# Altium PCB adapter.PcbDoc
Units mm, origin at the board's own origin, x right, y up, seen from the top; angles counter-clockwise.
Board outline 76.2 x 50.04 mm, 2 copper layers (Top Layer, Bottom Layer); 161 components, 104 nets, 335 pads, 14 vias.
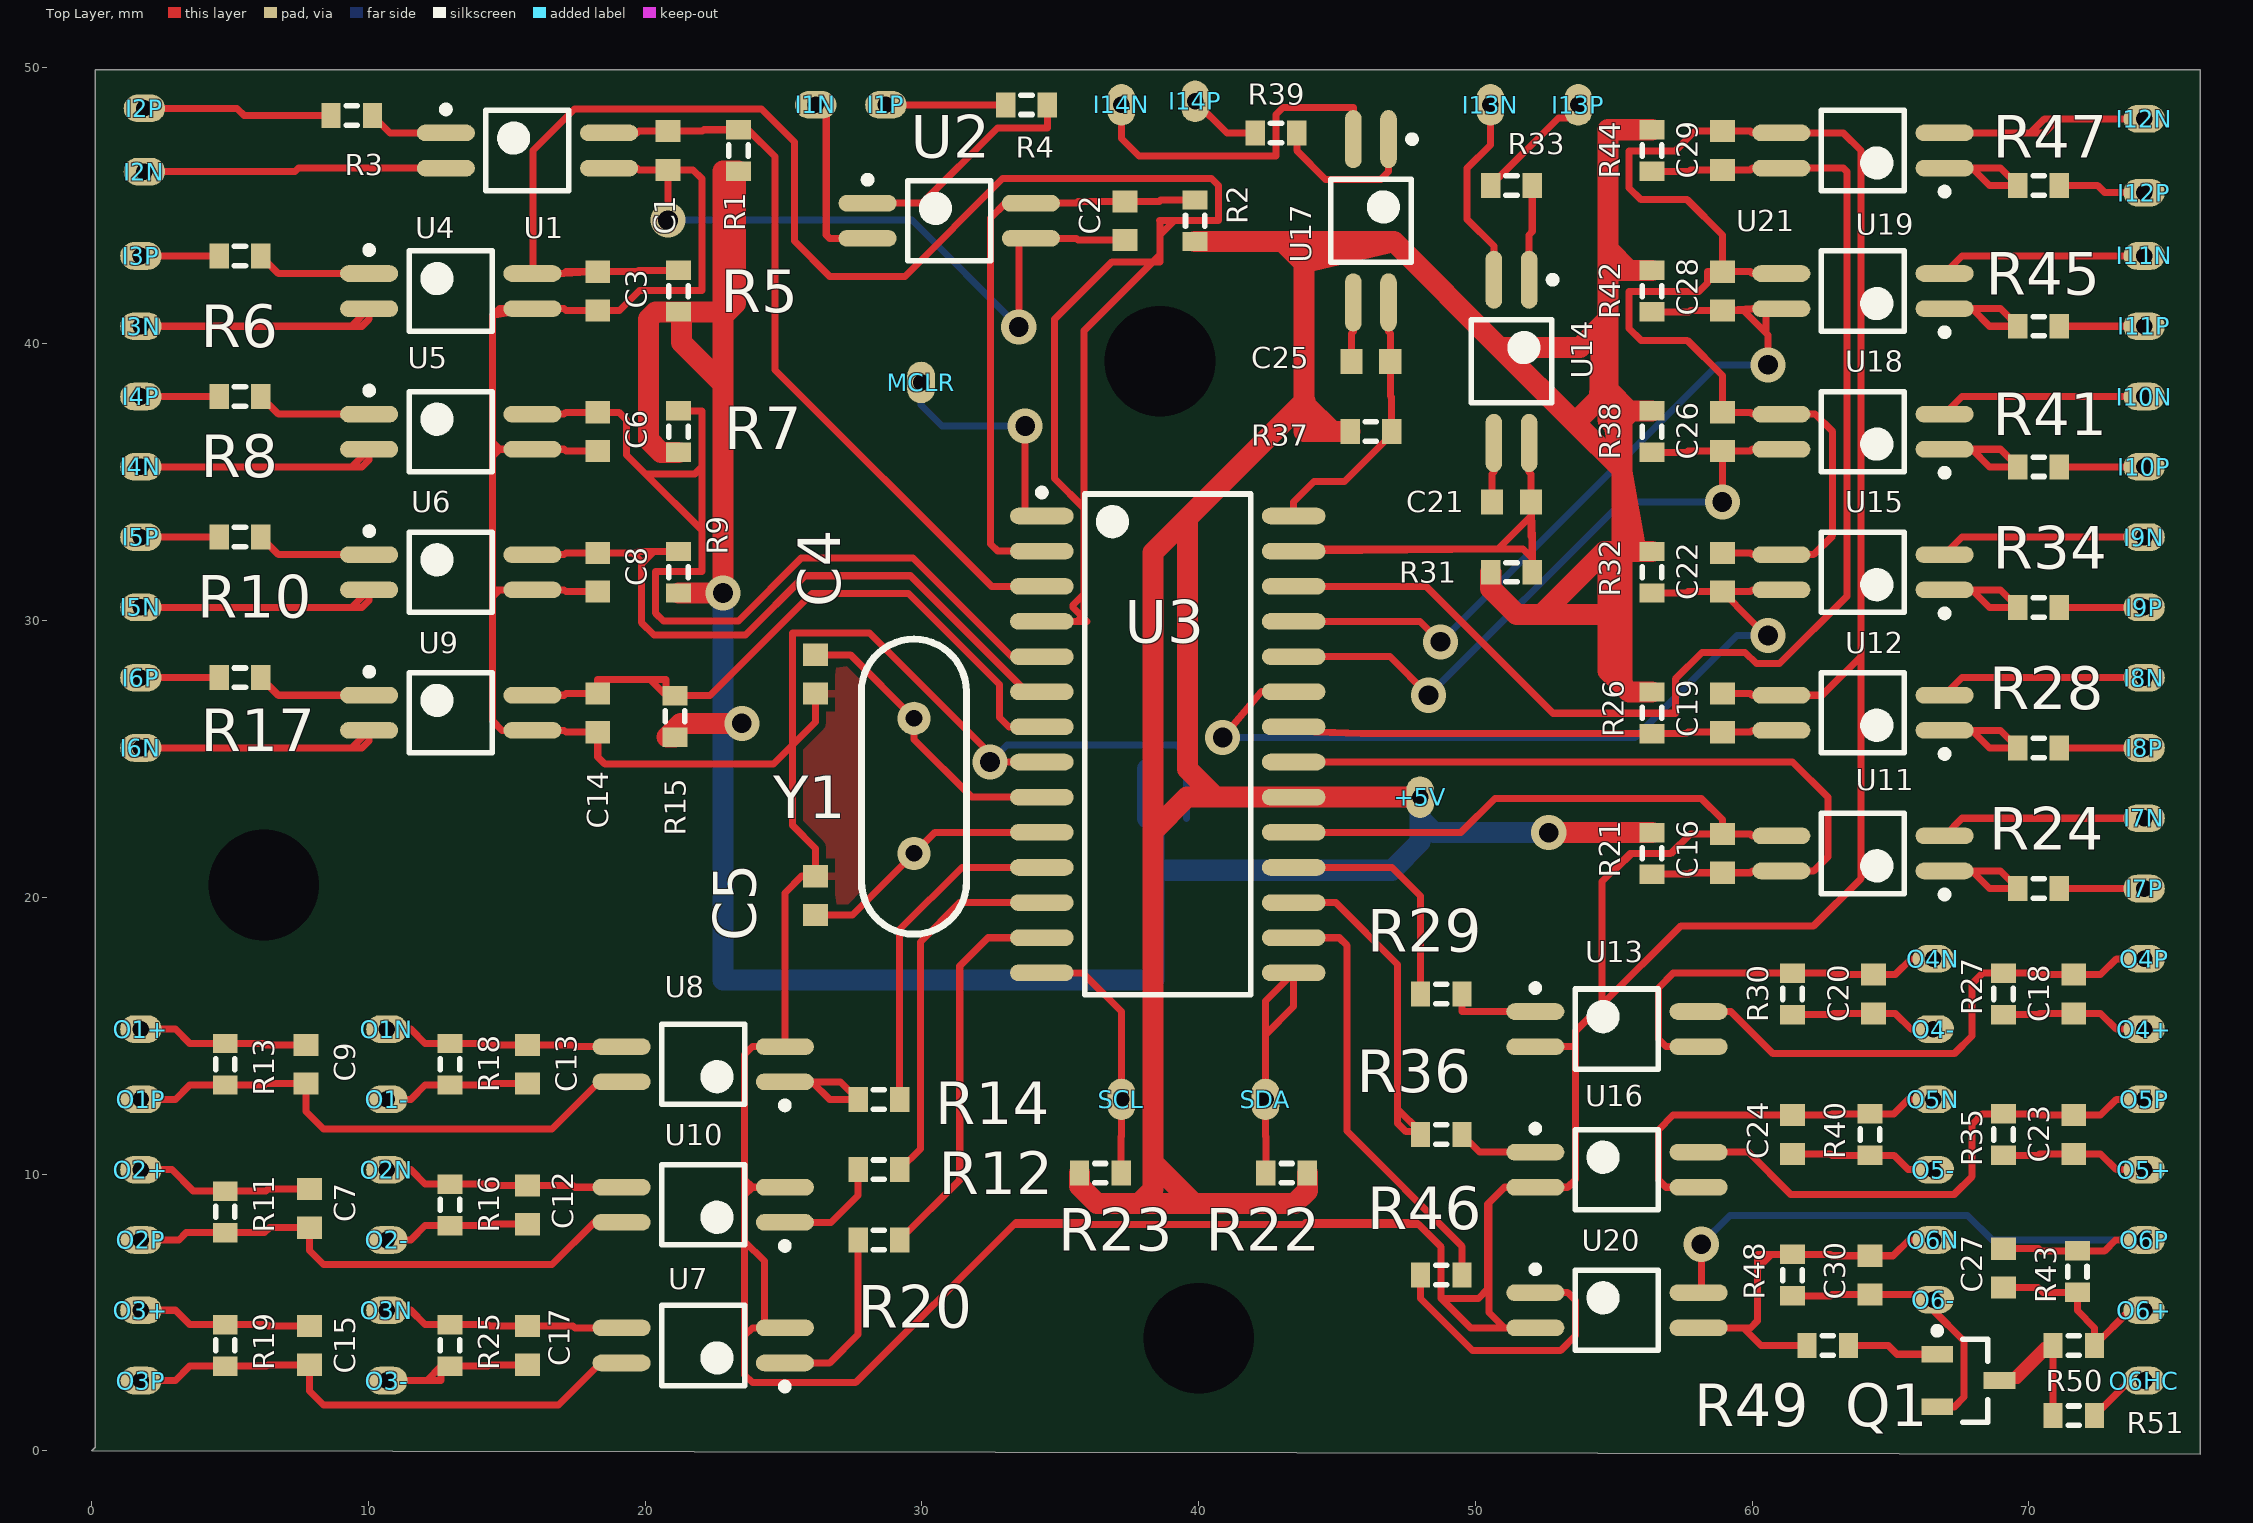
[diagram p0: Top Layer view]
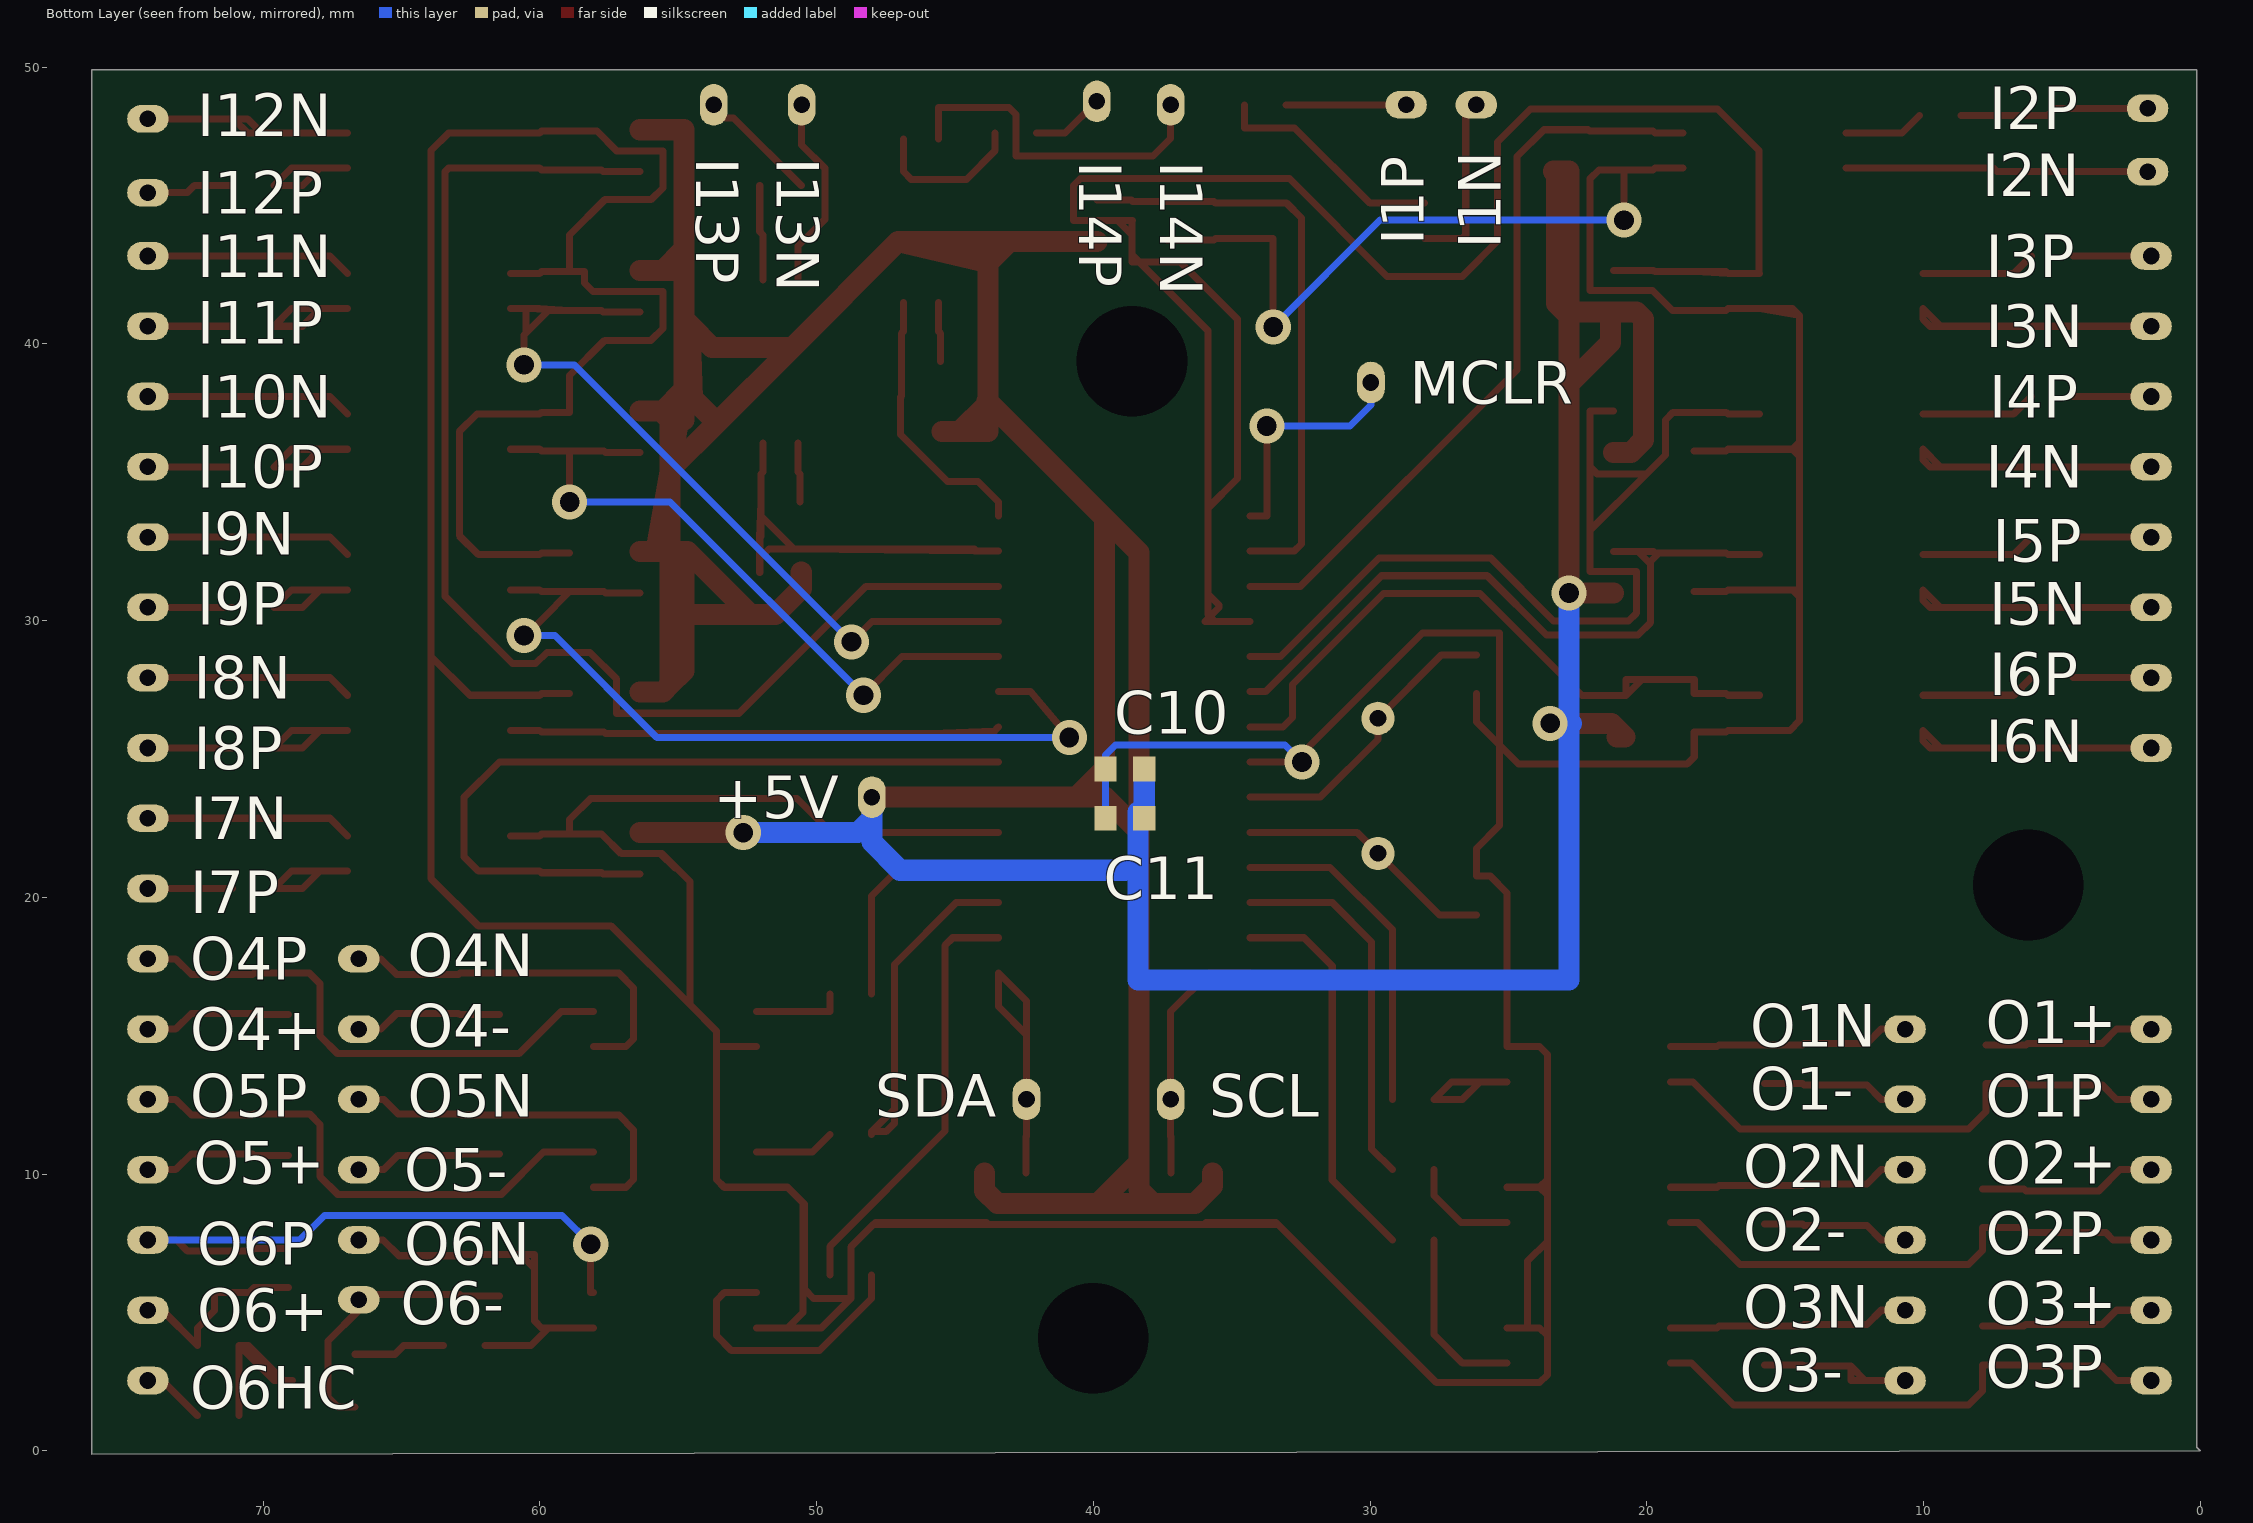
[diagram p1: Bottom Layer view, seen from below]

## Layer stack, top to bottom
Top Solder: solder mask 0.0102, Solder Resist, Dk 3.5
Top Layer: signal copper 0.0356
Dielectric 1: dielectric 0.32, FR-4, Dk 4.8
Bottom Layer: signal copper 0.0356
Bottom Solder: solder mask 0.0102, Solder Resist, Dk 3.5

## Board outline
0,0 0.127,0.127 0.127,49.911 76.2,49.911 76.2,-0.127

## Design rules (kind name [scope] priority, off if disabled: settings)
Clearance [All] p1: gap=0.254
HoleSize [All] p1: absolutevalues=TRUE maxlimit=5.08 minlimit=0.025 maxpercent=80.000 minpercent=20.000
PolygonConnect [All] p1: connectstyle=Relief reliefconductorwidth=0.254 reliefentries=4 polygonreliefangle="90 Angle" airgapwidth=0.254
RoutingVias [All] p1: holewidth=0.711 width=1.27 viastyle="Through Hole" minholewidth=0.711 minwidth=1.27 maxholewidth=0.711 maxwidth=1.27
SilkToSilkClearance [All] p1: silktosilkclearance=0.1
SilkToSolderMaskClearance [IsPad] p1: minsilkscreentomaskgap=0.1 clearancetoexposedcopper=TRUE
SolderMaskExpansion [All] p1: expansion=0.102
Width VCC_Width [InNet('VCC')] p1: maxlimit=1.016 minlimit=0.508 preferedwidth=0.762 minimp=50.000000 maximp=50.000000 favimp=50.000000
Width [All] p2: maxlimit=0.254 minlimit=0.254 preferedwidth=0.254
27 further rules are at their usual default settings.

## Components (designator, comment, footprint, x,y, rotation, side; value= is the part's Value field where it differs from the comment)
+5V "IN" PIN1L 48.006,23.622 r180 top
C1 "10nF" 1608[0603] 20.828,46.99 r90 top
C2 "10nF" 1608[0603] 37.338,44.45 r90 top
C3 "10nF" 1608[0603] 18.288,41.91 r90 top
C4 "32pF" 1608[0603] 26.162,28.067 r90 top
C5 "32pF" 1608[0603] 26.162,20.066 r90 top
C6 "10nF" 1608[0603] 18.288,36.83 r90 top
C7 "10nF" 1608[0603] 7.874,8.763 r90 top
C8 "10nF" 1608[0603] 18.288,31.75 r90 top
C9 "10nF" 1608[0603] 7.747,13.97 r90 top
C10 "10uF" 1608[0603] 38.862,24.638 r180 bottom
C11 "100nF" 1608[0603] 38.862,22.86 r180 bottom
C12 "10nF" 1608[0603] 15.748,8.89 r90 top
C13 "10nF" 1608[0603] 15.748,13.97 r90 top
C14 "10nF" 1608[0603] 18.288,26.67 r90 top
C15 "10nF" 1608[0603] 7.874,3.81 r90 top
C16 "10nF" 1608[0603] 58.928,21.59 r270 top
C17 "10nF" 1608[0603] 15.748,3.81 r90 top
C18 "10nF" 1608[0603] 71.628,16.51 r270 top
C19 "10nF" 1608[0603] 58.928,26.67 r270 top
C20 "10nF" 1608[0603] 64.389,16.51 r90 top
C21 "10nF" 1608[0603] 51.308,34.29 r0 top
C22 "10nF" 1608[0603] 58.928,31.75 r270 top
C23 "10nF" 1608[0603] 71.628,11.43 r270 top
C24 "10nF" 1608[0603] 61.468,11.43 r90 top
C25 "10nF" 1608[0603] 46.228,39.37 r0 top
C26 "10nF" 1608[0603] 58.928,36.83 r270 top
C27 "10nF" 1608[0603] 69.088,6.604 r270 top
C28 "10nF" 1608[0603] 58.928,41.91 r270 top
C29 "10nF" 1608[0603] 58.928,46.99 r270 top
C30 "10nF" 1608[0603] 64.262,6.35 r90 top
I1N "IN" PIN1L 26.162,48.641 r90 top
I1P "IN" PIN1L 28.702,48.641 r270 top
I2N "IN" PIN1L 1.905,46.228 r270 top
I2P "IN" PIN1L 1.905,48.514 r270 top
I3N "IN" PIN1L 1.778,40.64 r270 top
I3P "IN" PIN1L 1.778,43.18 r90 top
I4N "IN" PIN1L 1.778,35.56 r270 top
I4P "IN" PIN1L 1.778,38.1 r270 top
I5N "IN" PIN1L 1.778,30.48 r270 top
I5P "IN" PIN1L 1.778,33.02 r270 top
I6N "IN" PIN1L 1.778,25.4 r270 top
I6P "IN" PIN1L 1.778,27.94 r270 top
I7N "IN" PIN1L 74.168,22.86 r270 top
I7P "IN" PIN1L 74.168,20.32 r270 top
I8N "IN" PIN1L 74.168,27.94 r90 top
I8P "IN" PIN1L 74.168,25.4 r90 top
I9N "IN" PIN1L 74.168,33.02 r270 top
I9P "IN" PIN1L 74.168,30.48 r270 top
I10N "IN" PIN1L 74.168,38.1 r270 top
I10P "IN" PIN1L 74.168,35.56 r270 top
I11N "IN" PIN1L 74.168,43.18 r270 top
I11P "IN" PIN1L 74.168,40.64 r270 top
I12N "IN" PIN1L 74.168,48.133 r270 top
I12P "IN" PIN1L 74.168,45.466 r270 top
I13N "IN" PIN1L 50.546,48.641 r180 top
I13P "IN" PIN1L 53.721,48.641 r180 top
I14N "IN" PIN1L 37.211,48.641 r180 top
I14P "IN" PIN1L 39.878,48.768 r180 top
MCLR "IN" PIN1L 29.972,38.608 r180 top
O1+ "SDA" PIN1L 1.778,15.24 r270 top
O1- "SDA" PIN1L 10.668,12.7 r90 top
O1N "SDA" PIN1L 10.668,15.24 r270 top
O1P "SDA" PIN1L 1.778,12.7 r270 top
O2+ "SDA" PIN1L 1.778,10.16 r270 top
O2- "SDA" PIN1L 10.668,7.62 r90 top
O2N "SDA" PIN1L 10.668,10.16 r270 top
O2P "SDA" PIN1L 1.778,7.62 r270 top
O3+ "SDA" PIN1L 1.778,5.08 r270 top
O3- "SDA" PIN1L 10.668,2.54 r90 top
O3N "SDA" PIN1L 10.668,5.08 r90 top
O3P "SDA" PIN1L 1.778,2.54 r270 top
O4+ "SDA" PIN1L 74.168,15.24 r270 top
O4- "SDA" PIN1L 66.548,15.24 r270 top
O4N "SDA" PIN1L 66.548,17.78 r270 top
O4P "SDA" PIN1L 74.168,17.78 r270 top
O5+ "SDA" PIN1L 74.168,10.16 r90 top
O5- "SDA" PIN1L 66.548,10.16 r270 top
O5N "SDA" PIN1L 66.548,12.7 r270 top
O5P "SDA" PIN1L 74.168,12.7 r270 top
O6+ "SDA" PIN1L 74.168,5.08 r270 top
O6- "SDA" PIN1L 66.548,5.461 r270 top
O6HC "SDA" PIN1L 74.168,2.54 r90 top
O6N "SDA" PIN1L 66.548,7.62 r270 top
O6P "SDA" PIN1L 74.168,7.62 r270 top
Q1 "BC847" SOT-23_N 67.818,2.54 r0 top
R1 "4.7k" J1-0603 23.368,46.99 r90 top
R2 "4.7k" J1-0603 39.878,44.45 r90 top
R3 "3.3k" J1-0603 9.398,48.26 r180 top
R4 "3.3k" J1-0603 33.782,48.641 r180 top
R5 "4.7k" J1-0603 21.209,41.91 r90 top
R6 "3.3k" J1-0603 5.358,43.18 r180 top
R7 "4.7k" J1-0603 21.209,36.83 r90 top
R8 "3.3k" J1-0603 5.358,38.1 r180 top
R9 "4.7k" J1-0603 21.209,31.75 r90 top
R10 "3.3k" J1-0603 5.358,33.02 r180 top
R11 "4.7k" J1-0603 4.826,8.636 r270 top
R12 "3.3k" J1-0603 28.448,10.16 r180 top
R13 "4.7k" J1-0603 4.826,13.97 r270 top
R14 "3.3k" J1-0603 28.448,12.7 r180 top
R15 "4.7k" J1-0603 21.082,26.543 r90 top
R16 "4.7k" J1-0603 12.954,8.89 r270 top
R17 "3.3k" J1-0603 5.358,27.94 r180 top
R18 "4.7k" J1-0603 12.954,13.97 r270 top
R19 "4.7k" J1-0603 4.826,3.81 r270 top
R20 "3.3k" J1-0603 28.448,7.62 r180 top
R21 "4.7k" J1-0603 56.388,21.59 r270 top
R22 "3.3k" J1-0603 43.18,10.033 r180 top
R23 "3.3k" J1-0603 36.449,10.033 r0 top
R24 "3.3k" J1-0603 70.358,20.32 r0 top
R25 "4.7k" J1-0603 12.954,3.81 r270 top
R26 "4.7k" J1-0603 56.388,26.67 r270 top
R27 "4.7k" J1-0603 69.088,16.51 r90 top
R28 "3.3k" J1-0603 70.358,25.4 r0 top
R29 "3.3k" J1-0603 48.768,16.51 r0 top
R30 "4.7k" J1-0603 61.468,16.51 r270 top
R31 "4.7k" J1-0603 51.308,31.75 r0 top
R32 "4.7k" J1-0603 56.388,31.75 r270 top
R33 "3.3k" J1-0603 51.308,45.72 r180 top
R34 "3.3k" J1-0603 70.358,30.48 r0 top
R35 "4.7k" J1-0603 69.088,11.43 r90 top
R36 "3.3k" J1-0603 48.768,11.43 r0 top
R37 "4.7k" J1-0603 46.228,36.83 r0 top
R38 "4.7k" J1-0603 56.388,36.83 r270 top
R39 "3.3k" J1-0603 42.799,47.625 r180 top
R40 "4.7k" J1-0603 64.262,11.43 r270 top
R41 "3.3k" J1-0603 70.358,35.56 r0 top
R42 "4.7k" J1-0603 56.388,41.91 r270 top
R43 "4.7k" J1-0603 71.755,6.477 r90 top
R44 "4.7k" J1-0603 56.388,46.99 r270 top
R45 "3.3k" J1-0603 70.358,40.64 r0 top
R46 "3.3k" J1-0603 48.768,6.35 r180 top
R47 "3.3k" J1-0603 70.358,45.72 r0 top
R48 "4.7k" J1-0603 61.468,6.35 r270 top
R49 "1.2k" J1-0603 62.738,3.81 r0 top
R50 "4.7k" J1-0603 71.628,3.81 r180 top
R51 "1.2k" J1-0603 71.628,1.27 r0 top
SCL "SCL" PIN1L 37.211,12.7 r180 top
SDA "SDA" PIN1L 42.418,12.7 r180 top
U1 "PC3H71" PC3H71 15.748,46.99 r0 top
U2 "PC3H71" PC3H71 30.988,44.45 r0 top
U3 "PIC16F1938-I/SN" SOIC-SO28_N 38.887,25.527 r0 top
U4 "PC3H71" PC3H71 12.978,41.91 r0 top
U5 "PC3H71" PC3H71 12.978,36.83 r0 top
U6 "PC3H71" PC3H71 12.978,31.75 r0 top
U7 "PC3H71" PC3H71 22.098,8.89 r180 top
U8 "PC3H71" PC3H71 22.098,13.97 r180 top
U9 "PC3H71" PC3H71 12.978,26.67 r0 top
U10 "PC3H71" PC3H71 22.098,3.81 r180 top
U11 "PC3H71" PC3H71 64.008,21.59 r180 top
U12 "PC3H71" PC3H71 64.008,26.67 r180 top
U13 "PC3H71" PC3H71 55.118,15.24 r0 top
U14 "PC3H71" PC3H71 51.308,39.37 r270 top
U15 "PC3H71" PC3H71 64.008,31.75 r180 top
U16 "PC3H71" PC3H71 55.118,10.16 r0 top
U17 "PC3H71" PC3H71 46.228,44.45 r270 top
U18 "PC3H71" PC3H71 64.008,36.83 r180 top
U19 "PC3H71" PC3H71 64.008,41.91 r180 top
U20 "PC3H71" PC3H71 55.118,5.08 r0 top
U21 "PC3H71" PC3H71 64.008,46.99 r180 top
Y1 "20Mhz" XTAL 29.718,21.59 r90 top

## Footprints (in the part's own frame and the unit in brackets; to place one, negate y for a bottom-side part, rotate by r counter-clockwise, add the part's x,y. Pads: shape width x height; smd on the part's side, far side on the other; paste and mask are expansions set on the pad)
1608[0603] [mm] "Chip Capacitor, Body 1.6x0.8mm, IPC High Density"
  rect 0.8x0.9 smd: 1(-0.7,0) 2(0.7,0)
  body extent -0.87,-0.48 0.87,0.48, height 1.3
J1-0603 [mm] "Chip Resistor, Body 1.6x0.8mm, IPC High Density"
  rect 0.7x0.9 smd: 1(-0.75,0) 2(0.75,0)
  silkscreen extent -0.2,-0.35 0.2,0.35, body extent -0.85,-0.48 0.85,0.48, height 0.9
PC3H71 [mm]
  oval 2.1x0.6 smd: 1(-2.95,0.635) 2(-2.95,-0.635) 3(2.95,-0.635) 4(2.95,0.635)
  silkscreen extent -3.07,-1.45 1.5,1.61, body extent -2.3,-1.45 2.3,1.45, height 2.2
PIN1L [mm] "Connector; Plug"
  oval 1x1.5 hole 0.6: 1(0,0)
SOIC-SO28_N [mm] "SOIC, 28-Leads, Body 17.9x7.5mm, Pitch 1.27mm, IPC Medium Density"
  oval 2.3x0.6 smd: 1(-4.55,8.255) 2(-4.55,6.985) 3(-4.55,5.715) 4(-4.55,4.445) 5(-4.55,3.175) 6(-4.55,1.905) 7(-4.55,0.635) 8(-4.55,-0.635) 9(-4.55,-1.905) 10(-4.55,-3.175) 11(-4.55,-4.445) 12(-4.55,-5.715) 13(-4.55,-6.985) 14(-4.55,-8.255) 15(4.55,-8.255) 16(4.55,-6.985) 17(4.55,-5.715) 18(4.55,-4.445) 19(4.55,-3.175) 20(4.55,-1.905) 21(4.55,-0.635) 22(4.55,0.635) 23(4.55,1.905) 24(4.55,3.175) 25(4.55,4.445) 26(4.55,5.715) 27(4.55,6.985) 28(4.55,8.255)
  silkscreen extent -4.67,-9.05 3,9.23, body extent -3.8,-9.06 3.8,9.06, height 2.65
SOT-23_N [mm] "SOT23, 3-Leads, Body 2.9x1.3mm, Pitch 0.95mm, Lead Span 2.5mm, IPC Medium Density"
  rect 1.15x0.6 smd: 1(-1.125,0.95) 2(-1.125,-0.95) 3(1.125,0)
  silkscreen extent -1.25,-1.5 0.7,1.92, body extent -0.7,-1.5 0.7,1.5, height 1.1
XTAL [mm]
  round 1.2 hole 0.6: 1(0,0) 2(4.88,0)
  silkscreen extent -2.92,-1.9 7.74,1.91

## Part data
+5V I1N I1P I2N I2P I3N I3P I4N I4P I5N I5P I6N I6P I7N I7P I8N I8P I9N I9P I10N I10P I11N I11P I12N I12P I13N I13P I14N I14P MCLR O1+ O1- O1N O1P O2+ O2- O2N O2P O3+ O3- O3N O3P O4+ O4- O4N O4P O5+ O5- O5N O5P O6+ O6- O6HC O6N O6P SCL SDA: library part Socket, "Socket"
C1 C2 C3 C4 C5 C6 C7 C8 C9 C10 C11 C12 C13 C14 C15 C16 C17 C18 C19 C20 C21 C22 C23 C24 C25 C26 C27 C28 C29 C30: library part Cap, "Capacitor"
Q1: library part NPN, "NPN Bipolar Transistor"
R1 R2 R3 R4 R5 R6 R7 R8 R9 R10 R11 R12 R13 R14 R15 R16 R17 R18 R19 R20 R21 R22 R23 R24 R25 R26 R27 R28 R29 R30 R31 R32 R33 R34 R35 R36 R37 R38 R39 R40 R41 R42 R43 R44 R45 R46 R47 R48 R49 R50 R51: library part Res3, "Resistor"
U1 U2 U4 U5 U6 U7 U8 U9 U10 U11 U12 U13 U14 U15 U16 U17 U18 U19 U20 U21: library part Optoisolator1, "4-Pin Phototransistor Optocoupler"
U3: library part PIC16F1936-I/SO, "CMOS Microcontroller with LCD Driver, 8K (words) Program Memory, 256 Bytes Data Memory, 512 Bytes SRAM, 25 I/O's, 28-Pin SOIC, Industrial Temperature"
Y1: library part XTAL, "Crystal Oscillator"

## Free pads (board coordinates)
  round 1.524 hole 4 unplated: 2(38.608,39.37) 3(40.005,4.064) 4(6.223,20.447)

## Via types
v1: diameter 1.27, hole 0.711, Top Layer to Bottom Layer, 14 vias

## Nets (pads, with @x,y where several pads share a name; then routed paths per layer and width w, separated by ;. In a path a pad name is that pad's centre, name@x,y a point inside that pad or via, vN(x,y) a via of type N, cw(c..) or ccw(c..) an arc to the next point about the centre after c; other vN are vias at no path point)
GND: C1.1 C2.1 C3.1 C4.1 C5.2 C6.1 C8.1 C10.1 C11.1 C14.1 C16.1 C19.1 C22.1 C26.1 C28.1 C29.1 U1.3 U2.3 U3.8 U3.19 U4.3 U5.3 U6.3 U7.2 U8.2 U9.3 U10.2 U11.3 U12.3 U13.2 U15.3 U16.2 U18.3 U19.3 U20.2 U21.3 | length 310.4
  Top Layer w0.254: 14.593,36.195 14.732,36.195 ; C8.1 17.134,31.05 17.069,31.115 U6.3 14.732,31.115 ; C6.1 17.134,36.13 17.069,36.195 U5.3 14.732,36.195 ; U1.3 19.71,46.355 19.775,46.29 C1.1 ; v1(20.828,44.475) C1.1 ; U10.2 U10.2@24.308,4.445 ; U7.2 23.876,9.525 ; C4.1 26.162,26.34 25.324,25.502 ; v1(32.461,24.892) v1@32.766,24.892 ; v1(33.503,40.615) 33.503,43.815 U2.3 35.585,43.815 35.65,43.75 C2.1 ; U3.8 v1@32.766,24.892 ; U3.19 49.479,22.352 50.706,23.579 58.166,23.579 58.928,22.817 C16.1 ; U20.2 51.054,4.445 ; U13.2 53.619,14.605 ; 55.118,21.057 55.639,21.578 ; C19.1 59.944,27.37 60.009,27.305 U12.3 62.535,27.305 63.932,28.702 ; C22.1 59.944,32.45 60.009,32.385 U15.3 62.23,32.385 62.916,33.071 62.916,36.83 62.281,37.465 U18.3 60.009,37.465 59.944,37.53 C26.1 58.928,38.862 57.658,40.132 55.982,40.132 55.557,40.557 55.557,41.891 58.09,41.891 58.395,42.196 58.395,42.61 C28.1 ; U11.3 60.009,22.225 59.944,22.29 C16.1 ; U19.3 60.009,42.545 59.944,42.61 C28.1 ; 14.478,30.861 14.732,31.115 ; 14.478,30.861 14.478,26.391 14.834,26.035 U9.3 17.069,26.035 17.134,25.97 C14.1 18.288,25.07 18.542,24.816 24.638,24.816 25.324,25.502 ; 14.478,30.861 14.478,31.115 ; 14.478,31.115 14.732,31.115 ; 14.478,31.115 14.478,35.941 ; 14.478,35.941 14.732,36.195 ; 14.478,35.941 14.478,36.449 ; 14.478,36.449 14.478,41.021 ; 14.478,36.449 14.732,36.195 ; 14.478,41.021 14.732,41.275 U4.3 ; 14.478,41.021 U4.3 ; U4.3 17.069,41.275 17.134,41.21 C3.1 19.075,41.21 19.794,41.929 22.047,41.929 22.047,45.974 21.731,46.29 C1.1 ; 23.597,4.166 23.876,4.445 U10.2@24.308,4.445 ; 23.597,4.166 23.597,2.743 23.876,2.464 27.61,2.464 33.325,8.179 ; 23.597,4.166 23.597,7.569 ; 23.597,7.569 24.308,6.858 U10.2@24.308,4.445 ; 23.597,7.569 23.597,9.246 ; 23.597,9.246 23.876,9.525 ; 23.597,9.246 23.597,9.804 ; 23.597,9.804 23.876,9.525 ; 23.597,9.804 23.597,14.326 23.876,14.605 U8.2 25.048,20.16 25.654,20.766 C5.2 26.162,21.768 25.324,22.606 25.324,25.502 ; 25.324,25.502 25.324,29.548 28.11,29.548 v1@32.766,24.892 ; 33.325,8.179 33.401,8.255 35.93,8.255 36.006,8.179 ; 33.325,8.179 36.006,8.179 ; 36.006,8.179 43.788,8.179 ; 43.788,8.179 43.865,8.255 47.879,8.255 47.955,8.179 ; 43.788,8.179 47.955,8.179 ; 47.955,8.179 48.768,7.366 48.768,5.512 ; 48.768,5.512 50.114,5.512 50.444,5.842 50.444,8.915 50.495,8.966 ; 48.768,5.512 49.835,4.445 51.054,4.445 ; 50.495,8.966 51.054,9.525 U16.2 53.34,9.525 53.619,9.804 53.619,14.605 ; 50.495,8.966 50.495,5.004 51.054,4.445 ; 53.619,14.605 53.619,15.164 54.585,16.129 ; 54.585,16.129 54.585,20.574 55.589,21.578 55.639,21.578 ; 54.585,16.129 57.429,18.974 57.988,18.974 62.23,18.974 63.932,20.676 63.932,28.702 ; 55.639,21.578 57.062,21.578 57.774,22.29 C16.1 ; C28.1 58.928,43.942 57.658,45.212 55.982,45.212 55.557,45.637 55.557,46.971 57.226,46.971 57.945,47.69 C29.1 59.944,47.69 60.009,47.625 U21.3 63.297,47.625 63.932,46.99 63.932,28.702
  Bottom Layer w0.254: v1(20.828,44.475) 29.642,44.475 v1(33.503,40.615) ; v1(32.461,24.892) 33.071,25.502 39.206,25.502 39.562,25.146 C10.1 C11.1
NetC1_2: C1.2 R1.2 U1.4 U3.3 | length 27
  Top Layer w0.254: U1.4 19.71,47.625 19.775,47.69 C1.2 22.073,47.69 22.123,47.74 R1.2 23.724,47.74 24.689,46.775 24.689,39.065 32.512,31.242 U3.3
NetC2_2: C2.2 R2.2 U2.4 U3.2 | length 21.4
  Top Layer w0.254: U3.2 32.741,32.512 32.487,32.766 32.487,44.557 33.015,45.085 U2.4 35.585,45.085 35.65,45.15 C2.2 38.583,45.15 38.633,45.2 R2.2
NetC3_2: C3.2 R5.2 U3.4 U4.4 | length 77.6
  Top Layer w0.254: U4.4 U4.4@15.951,42.545 ; R5.2 19.76,42.66 19.71,42.61 C3.2 ; U3.4 35.614,29.972 ; U4.4@15.951,42.545 17.069,42.545 ; U4.4@15.951,42.545 15.951,46.99 17.45,48.489 24.206,48.489 25.4,47.295 25.4,43.713 26.67,42.443 29.388,42.443 32.918,45.974 40.462,45.974 40.716,45.72 40.716,44.465 39.131,44.465 ; 17.069,42.545 17.134,42.61 C3.2 ; 17.069,42.545 C3.2 ; 35.614,29.972 35.79,30.148 ; 35.614,29.972 35.966,29.972 35.79,30.148 ; 35.79,30.148 35.868,30.226 35.868,30.96 ; 35.79,30.148 35.469,30.47 35.469,30.561 35.868,30.96 ; 35.868,30.96 35.868,34.064 ; 35.868,34.064 34.798,35.134 34.798,40.894 36.873,42.969 38.354,42.969 ; 35.868,34.064 35.868,40.483 38.354,42.969 ; 38.354,42.969 38.608,43.223 ; 38.354,42.969 38.608,42.969 38.608,43.223 ; 38.608,43.223 38.608,43.942 ; 38.608,43.942 39.131,44.465 ; 38.608,43.942 38.608,44.45 38.593,44.465 39.131,44.465
NetC4_2: C4.2 U3.9 Y1.2 | length 10.8
  Top Layer w0.254: C4.2 27.421,28.767 Y1.2 29.718,25.707 31.803,23.622 U3.9
NetC5_1: C5.1 U3.10 Y1.1 | length 9.4
  Top Layer w0.254: C5.1 27.494,19.366 Y1.1 30.48,22.352 U3.10
NetC6_2: C6.2 R7.2 U3.5 U5.4 | length 37.1
  Top Layer w0.254: U5.4 17.069,37.465 17.134,37.53 C6.2 19.05,37.53 19.329,37.251 19.329,35.992 20.015,35.306 ; R7.2 22.047,37.58 22.047,35.56 ; U3.5 33.233,28.702 29.677,32.258 25.642,32.258 23.368,29.984 20.663,29.984 20.378,30.269 20.378,31.769 22.047,31.769 22.047,33.274 ; 20.015,35.306 22.047,33.274 ; 20.015,35.306 21.793,35.306 22.047,35.56 ; 22.047,33.274 22.047,35.56
NetC7_1: C7.1 O2P.1 R11.2 U7.4 | length 19.2
  Top Layer w0.254: O2P.1 3.15,7.62 3.416,7.886 R11.2 6.248,7.886 6.425,8.063 C7.1 7.874,7.239 8.382,6.731 16.637,6.731 18.161,8.255 U7.4
NetC7_2: C7.2 O2+.1 R11.1 | length 6.4
  Top Layer w0.254: O2+.1 2.896,10.16 3.67,9.386 R11.1 6.299,9.386 6.376,9.463 C7.2
NetC8_2: C8.2 R9.2 U3.6 U6.4 | length 25.9
  Top Layer w0.254: U6.4 17.069,32.385 17.134,32.45 C8.2 19.558,32.45 ; R9.2 20.32,32.5 ; U3.6 33.785,27.432 29.594,31.623 25.769,31.623 23.622,29.476 20.32,29.476 19.87,29.926 19.87,32.05 ; 19.558,32.45 19.71,32.45 19.76,32.5 20.32,32.5 ; 19.558,32.45 19.87,32.138 19.87,32.05 ; 19.87,32.05 20.32,32.5
NetC9_1: C9.1 O1P.1 R13.2 U8.4 | length 19.6
  Top Layer w0.254: O1P.1 3.023,12.7 3.543,13.22 R13.2 6.248,13.22 6.298,13.27 C9.1 7.747,12.268 8.382,11.633 16.637,11.633 18.339,13.335 U8.4
NetC9_2: C9.2 O1+.1 R13.1 | length 6.2
  Top Layer w0.254: O1+.1 3.023,15.24 3.543,14.72 R13.1 6.248,14.72 6.298,14.67 C9.2
NetC12_1: C12.1 O2-.1 R16.2 | length 5.3
  Top Layer w0.254: O2-.1 11.532,7.62 12.052,8.14 R16.2 14.326,8.14 14.376,8.19 C12.1
NetC12_2: C12.2 O2N.1 R16.1 U7.3 | length 8.7
  Top Layer w0.254: O2N.1 11.532,10.16 12.052,9.64 R16.1 14.326,9.64 14.376,9.59 C12.2 17.399,9.59 17.464,9.525 U7.3
NetC13_1: C13.1 O1-.1 R18.2 | length 5.3
  Top Layer w0.254: O1-.1 11.532,12.7 12.052,13.22 R18.2 14.326,13.22 14.376,13.27 C13.1
NetC13_2: C13.2 O1N.1 R18.1 U8.3 | length 8.7
  Top Layer w0.254: O1N.1 11.532,15.24 12.052,14.72 R18.1 14.326,14.72 14.376,14.67 C13.2 17.399,14.67 17.464,14.605 U8.3
NetC14_2: C14.2 R15.2 U3.7 U9.4 | length 24.6
  Top Layer w0.254: U9.4 17.069,27.305 17.134,27.37 C14.2 18.288,27.87 20.182,27.87 ; U3.7 33.147,26.162 32.806,26.503 32.806,27.693 29.511,30.988 26.035,30.988 22.34,27.293 R15.2 R15.2@20.759,27.293 ; 20.182,27.87 R15.2@20.759,27.293 ; 20.182,27.87 20.759,27.87 R15.2@20.759,27.293
NetC15_1: C15.1 O3P.1 R19.2 U10.4 | length 19.4
  Top Layer w0.254: O3P.1 3.023,2.54 3.543,3.06 R19.2 6.325,3.06 6.375,3.11 C15.1 7.874,2.159 8.382,1.651 16.866,1.651 18.39,3.175 U10.4
NetC15_2: C15.2 O3+.1 R19.1 | length 6.3
  Top Layer w0.254: O3+.1 3.023,5.08 3.543,4.56 R19.1 6.325,4.56 6.375,4.51 C15.2
NetC16_2: C16.2 R21.2 U3.21 U11.4 | length 28.6
  Top Layer w0.254: U3.21 61.468,24.892 62.738,23.622 62.738,21.463 62.23,20.955 U11.4 60.009,20.955 59.944,20.89 C16.2 57.777,20.89 57.727,20.84 R21.2
NetC17_1: C17.1 O3-.1 R25.2 | length 6.4
  Top Layer w0.254: O3-.1 12.111,2.54 ; C17.1 14.376,3.11 14.326,3.06 R25.2 R25.2@12.631,3.06 ; 12.111,2.54 R25.2@12.631,3.06 ; 12.111,2.54 12.631,2.54 R25.2@12.631,3.06
NetC17_2: C17.2 O3N.1 R25.1 U10.3 | length 8.7
  Top Layer w0.254: O3N.1 11.532,5.08 12.052,4.56 R25.1 14.326,4.56 14.376,4.51 C17.2 17.399,4.51 17.464,4.445 U10.3
NetC18_1: C18.1 O4P.1 R27.2 U13.4 | length 19.3
  Top Layer w0.254: U13.4 59.233,15.875 60.757,14.351 67.31,14.351 67.945,14.986 67.945,16.879 68.326,17.26 R27.2 70.333,17.26 70.383,17.21 C18.1 72.593,17.21 73.163,17.78 O4P.1
NetC18_2: C18.2 O4+.1 R27.1 | length 5.3
  Top Layer w0.254: R27.1 70.333,15.76 70.383,15.81 C18.2 72.593,15.81 73.163,15.24 O4+.1
NetC19_2: C19.2 R26.2 U3.22 U12.4 | length 17.7
  Top Layer w0.254: U3.22 43.583,26.004 45.873,25.92 R26.2 57.633,25.92 57.683,25.97 C19.2 59.944,25.97 60.009,26.035 U12.4
NetC20_1: C20.1 O4-.1 R30.2 | length 5.3
  Top Layer w0.254: R30.2 62.89,15.76 62.94,15.81 C20.1 65.176,15.81 65.746,15.24 O4-.1
NetC20_2: C20.2 O4N.1 R30.1 U13.3 | length 13.8
  Top Layer w0.254: U13.3 56.896,14.605 56.617,14.884 56.617,16.727 57.15,17.26 R30.1 62.89,17.26 62.94,17.21 C20.2 65.176,17.21 65.746,17.78 O4N.1
NetC21_1: C21.1 U14.3 | length 2.2
  Top Layer w0.254: C21.1 50.608,35.306 50.673,35.371 U14.3
NetC21_2: C21.2 R31.2 U3.27 U14.4 | length 23.1
  Top Layer w0.254: U3.27 U3.27@44.298,32.512 ; U14.4 51.943,35.371 52.008,35.306 C21.2 ; R31.2 52.058,32.258 ; U3.27@44.298,32.512 50.814,32.588 ; U3.27@44.298,32.512 44.298,32.588 50.814,32.588 ; 50.814,32.588 52.008,33.782 ; 50.814,32.588 51.728,32.588 52.058,32.258 ; 52.008,33.782 52.008,33.045 52.058,32.995 ; 52.008,33.782 C21.2 ; C21.2 52.058,32.995 ; 52.058,32.258 52.058,32.995
NetC22_2: C22.2 R32.2 U3.23 U15.4 | length 31.6
  Top Layer w0.254: v1(40.869,25.781) 42.266,27.432 U3.23 ; R32.2 57.633,31 57.683,31.05 C22.2 ; v1(60.579,29.464) 60.514,29.464 59.93,30.048 C22.2 ; U15.4 60.009,31.115 59.944,31.05 C22.2
  Bottom Layer w0.254: v1(40.869,25.781) 55.778,25.781 59.461,29.464 v1(60.579,29.464)
NetC23_1: C23.1 O5P.1 R35.2 U16.4 | length 19.3
  Top Layer w0.254: U16.4 59.868,10.795 61.392,9.271 67.31,9.271 67.945,9.906 67.945,11.799 68.326,12.18 R35.2 70.333,12.18 70.383,12.13 C23.1 72.593,12.13 73.163,12.7 O5P.1
NetC23_2: C23.2 O5+.1 R35.1 | length 5.3
  Top Layer w0.254: R35.1 70.333,10.68 70.383,10.73 C23.2 72.593,10.73 73.163,10.16 O5+.1
NetC24_1: C24.1 O5-.1 R40.2 | length 5.3
  Top Layer w0.254: C24.1 62.84,10.73 62.89,10.68 R40.2 65.126,10.68 65.646,10.16 O5-.1
NetC24_2: C24.2 O5N.1 R40.1 U16.3 | length 13.7
  Top Layer w0.254: U16.3 56.896,9.525 56.617,9.804 56.617,11.597 57.15,12.13 C24.2 62.84,12.13 62.89,12.18 R40.1 65.126,12.18 65.646,12.7 O5N.1
NetC25_1: C25.1 U17.3 | length 2.2
  Top Layer w0.254: C25.1 45.528,40.386 45.593,40.451 U17.3
NetC25_2: C25.2 R37.2 U3.28 U17.4 | length 9.9
  Top Layer w0.254: U3.28 43.437,34.29 44.173,35.027 45.276,35.027 46.978,36.728 R37.2 46.978,38.075 46.928,38.125 C25.2 46.928,40.386 46.863,40.451 U17.4
NetC26_2: C26.2 R38.2 U3.24 U18.4 | length 25.5
  Top Layer w0.254: U3.24 46.914,28.702 v1(48.311,27.305) ; R38.2 57.633,36.08 57.683,36.13 C26.2 ; v1(58.928,34.29) C26.2 ; U18.4 60.009,36.195 59.944,36.13 C26.2
  Bottom Layer w0.254: v1(48.311,27.305) 55.296,34.29 v1(58.928,34.29)
NetC27_1: C27.1 O6P.1 R43.2 U20.4 | length 24
  Top Layer w0.254: U20.4 58.166,5.715 v1(58.166,7.468) v1@58.166,7.493 ; C27.1 70.358,7.304 70.435,7.227 R43.2 72.746,7.227 73.139,7.62 O6P.1
  Bottom Layer w0.254: v1(58.166,7.468) 59.207,8.509 67.793,8.509 68.682,7.62 O6P.1
NetC27_2: C27.2 O6+.1 R43.1 R50.1 | length 7.2
  Top Layer w0.254: C27.2 70.333,5.904 70.51,5.727 R43.1 71.755,5.068 72.378,4.445 R50.1 73.648,5.08 O6+.1
NetC28_2: C28.2 R42.2 U3.25 U19.4 | length 31.8
  Top Layer w0.254: U3.25 48.006,29.972 v1(48.743,29.235) ; R42.2 57.727,41.16 57.777,41.21 C28.2 ; v1(60.579,39.243) 60.579,40.321 60.503,40.397 ; U19.4 U19.4@60.503,41.275 ; C28.2 60.009,41.275 U19.4@60.503,41.275 ; C28.2 59.69,41.21 60.503,40.397 ; C28.2 U19.4@60.503,41.275 ; 60.503,40.397 U19.4@60.503,41.275
  Bottom Layer w0.254: v1(48.743,29.235) 58.75,39.243 v1(60.579,39.243)
NetC29_2: C29.2 R44.2 U3.26 U21.4 | length 47.2
  Top Layer w0.254: U3.26 48.219,31.242 52.807,26.655 57.226,26.655 57.226,27.889 58.191,28.854 59.752,28.854 60.158,28.448 61,28.448 63.424,30.872 63.424,46.228 63.297,46.355 U21.4 60.009,46.355 59.944,46.29 C29.2 57.777,46.29 57.727,46.24 R44.2
NetC30_1: C30.1 O6-.1 Q1.2 R48.2 | length 10.3
  Top Layer w0.254: R48.2 62.84,5.6 62.89,5.65 C30.1 66.359,5.65 O6-.1 66.548,5.08 67.666,3.962 67.666,1.946 67.31,1.59 Q1.2
NetC30_2: C30.2 O6N.1 R48.1 R49.1 U20.3 | length 14.5
  Top Layer w0.254: U20.3 59.69,4.445 ; R49.1 60.325,3.81 59.69,4.445 ; O6N.1 65.67,7.62 65.1,7.05 C30.2 62.89,7.05 62.84,7.1 R48.1 60.706,7.1 ; 59.69,4.445 59.944,4.445 60.198,4.699 60.198,6.592 ; 60.198,6.592 60.706,7.1 ; 60.198,6.592 60.198,7.1 60.706,7.1
NetI1N_1: I1N.1 U2.2 | length 6.6
  Top Layer w0.254: I1N.1 26.545,48.641 26.545,43.94 26.67,43.815 U2.2
NetI1P_1: I1P.1 R4.2 | length 4.3
  Top Layer w0.254: I1P.1 R4.2
NetI2N_1: I2N.1 U1.2 | length 10.9
  Top Layer w0.254: I2N.1 7.341,46.228 7.468,46.355 U1.2
NetI2P_1: I2P.1 R3.2 | length 6.8
  Top Layer w0.254: I2P.1 5.258,48.514 5.512,48.26 R3.2
NetI3N_1: I3N.1 U4.2 | length 9.6
  Top Layer w0.254: I3N.1 9.393,40.64 ; 9.393,40.64 U4.2 10.028,40.894 9.774,40.64 9.393,40.64
NetI3P_1: I3P.1 R6.2 | length 2.8
  Top Layer w0.254: I3P.1 R6.2
NetI4N_1: I4N.1 U5.2 | length 9.6
  Top Layer w0.254: I4N.1 9.393,35.56 ; 9.393,35.56 U5.2 10.028,35.814 9.774,35.56 9.393,35.56
NetI4P_1: I4P.1 R8.2 | length 2.8
  Top Layer w0.254: I4P.1 R8.2
NetI5N_1: I5N.1 U6.2 | length 9.6
  Top Layer w0.254: I5N.1 9.393,30.48 ; 9.393,30.48 U6.2 10.028,30.734 9.774,30.48 9.393,30.48
NetI5P_1: I5P.1 R10.2 | length 2.8
  Top Layer w0.254: I5P.1 R10.2
NetI6N_1: I6N.1 U9.2 | length 9.6
  Top Layer w0.254: I6N.1 9.393,25.4 ; 9.393,25.4 U9.2 10.028,25.654 9.774,25.4 9.393,25.4
NetI6P_1: I6P.1 R17.2 | length 2.8
  Top Layer w0.254: I6P.1 R17.2
NetI7N_1: I7N.1 U11.2 | length 7.5
  Top Layer w0.254: U11.2 67.593,22.86 I7N.1
NetI7P_1: I7P.1 R24.2 | length 3.1
  Top Layer w0.254: R24.2 I7P.1
NetI8N_1: I8N.1 U12.2 | length 7.5
  Top Layer w0.254: U12.2 67.593,27.94 I8N.1
NetI8P_1: I8P.1 R28.2 | length 3.1
  Top Layer w0.254: R28.2 I8P.1
NetI9N_1: I9N.1 U15.2 | length 7.5
  Top Layer w0.254: U15.2 67.593,33.02 I9N.1
NetI9P_1: I9P.1 R34.2 | length 3.1
  Top Layer w0.254: R34.2 I9P.1
NetI10N_1: I10N.1 U18.2 | length 7.5
  Top Layer w0.254: U18.2 67.593,38.1 I10N.1
NetI10P_1: I10P.1 R41.2 | length 3.1
  Top Layer w0.254: R41.2 I10P.1
NetI11N_1: I11N.1 U19.2 | length 7.5
  Top Layer w0.254: U19.2 67.593,43.18 I11N.1
NetI11P_1: I11P.1 R45.2 | length 3.1
  Top Layer w0.254: R45.2 I11P.1
NetI12N_1: I12N.1 U21.2 | length 8.6
  Top Layer w0.254: U21.2 70.053,47.625 ; I12N.1 71.069,48.133 ; 70.053,47.625 70.561,48.133 71.069,48.133 ; 70.053,47.625 70.561,47.625 71.069,48.133
NetI12P_1: I12P.1 R47.2 | length 3.2
  Top Layer w0.254: R47.2 72.492,45.72 72.746,45.466 I12P.1
NetI13N_1: I13N.1 U14.2 | length 7.1
  Top Layer w0.254: I13N.1 50.546,47.193 49.708,46.355 49.708,44.501 50.673,43.536 U14.2
NetI13P_1: I13P.1 R33.2 | length 4.6
  Top Layer w0.254: R33.2 53.01,48.172 53.721,48.172 I13P.1
NetI14N_1: I14N.1 U17.2 | length 12.6
  Top Layer w0.254: I14N.1 37.211,47.422 37.846,46.787 42.799,46.787 42.799,48.285 43.053,48.539 45.593,48.539 U17.2
NetI14P_1: I14P.1 R39.2 | length 2.6
  Top Layer w0.254: I14P.1 41.021,47.625 R39.2
NetMCLR_1: MCLR.1 U3.1 | length 8.7
  Top Layer w0.254: v1(33.731,37.033) 33.731,33.782 U3.1
  Bottom Layer w0.254: MCLR.1 29.972,37.795 30.734,37.033 v1(33.731,37.033)
NetO6HC_1: O6HC.1 R51.2 | length 2.3
  Top Layer w0.254: R51.2 73.648,2.54 O6HC.1
NetQ1_1: Q1.1 R49.2 | length 3.3
  Top Layer w0.254: R49.2 64.922,3.81 65.242,3.49 Q1.1
NetQ1_3: Q1.3 R50.2 R51.1 | length 7.1
  Top Layer w0.254: Q1.3 Q1.3@69.266,2.54 ; R51.1 R50.2 ; Q1.3@69.266,2.54 70.536,3.81 R50.2 ; Q1.3@69.266,2.54 69.608,2.54 R50.2
NetR3_1: R3.1 U1.1 | length 2.9
  Top Layer w0.254: R3.1 10.783,47.625 U1.1
NetR4_1: R4.1 U2.1 | length 8.5
  Top Layer w0.254: U2.1 30.011,45.085 32.729,47.803 34.532,47.803 R4.1
NetR6_1: R6.1 U4.1 | length 4.2
  Top Layer w0.254: R6.1 6.743,42.545 U4.1
NetR8_1: R8.1 U5.1 | length 4.2
  Top Layer w0.254: R8.1 6.743,37.465 U5.1
NetR10_1: R10.1 U6.1 | length 4.2
  Top Layer w0.254: R10.1 6.743,32.385 U6.1
NetR12_1: R12.1 U3.12 | length 13.5
  Top Layer w0.254: R12.1 29.947,10.909 29.947,18.39 31.369,19.812 U3.12
NetR12_2: R12.2 U7.1 | length 4
  Top Layer w0.254: U7.1 26.721,8.255 27.698,9.232 R12.2
NetR14_1: R14.1 U3.11 | length 12.2
  Top Layer w0.254: R14.1 29.198,18.835 31.445,21.082 U3.11
NetR14_2: R14.2 U8.1 | length 4.8
  Top Layer w0.254: U8.1 U8.1@26.035,13.335 ; U8.1@26.035,13.335 26.67,12.7 R14.2 27.063,13.335 U8.1@26.035,13.335
NetR17_1: R17.1 U9.1 | length 4.2
  Top Layer w0.254: R17.1 6.743,27.305 U9.1
NetR20_1: R20.1 U3.13 | length 14.2
  Top Layer w0.254: R20.1 31.369,9.791 31.369,17.526 32.385,18.542 U3.13
NetR20_2: R20.2 U10.1 | length 6.5
  Top Layer w0.254: U10.1 26.67,3.175 27.698,4.203 R20.2
NetR22_2: R22.2 SDA.1 U3.15 | length 10.3
  Top Layer w0.254: R22.2 42.43,11.354 42.418,11.366 SDA.1 42.418,15.037 ; 42.418,15.037 43.437,16.055 U3.15 42.418,16.253 42.418,15.037
NetR23_2: R23.2 SCL.1 U3.14 | length 9.3
  Top Layer w0.254: U3.14 35.814,17.272 37.211,15.875 SCL.1 37.211,11.366 37.199,11.354 R23.2
NetR24_1: R24.1 U11.1 | length 4.8
  Top Layer w0.254: U11.1 U11.1@67.945,20.955 ; U11.1@67.945,20.955 68.58,20.32 R24.1 68.973,20.955 U11.1@67.945,20.955
NetR28_1: R28.1 U12.1 | length 4.8
  Top Layer w0.254: U12.1 U12.1@67.945,26.035 ; U12.1@67.945,26.035 68.58,25.4 R28.1 68.973,26.035 U12.1@67.945,26.035
NetR29_1: R29.1 U3.18 | length 8.6
  Top Layer w0.254: U3.18 46.99,21.082 48.018,20.054 R29.1
NetR29_2: R29.2 U13.1 | length 3.3
  Top Layer w0.254: R29.2 49.518,15.875 U13.1
NetR33_1: R33.1 U14.1 | length 3.4
  Top Layer w0.254: U14.1 51.943,43.942 52.058,44.057 R33.1
NetR34_1: R34.1 U15.1 | length 4.8
  Top Layer w0.254: U15.1 U15.1@67.945,31.115 ; U15.1@67.945,31.115 68.58,30.48 R34.1 68.973,31.115 U15.1@67.945,31.115
NetR36_1: R36.1 U3.17 | length 12.6
  Top Layer w0.254: U3.17 44.958,19.812 47.193,17.577 47.193,12.356 ; R36.1 R36.1@48.018,11.532 ; 47.193,12.356 R36.1@48.018,11.532 ; 47.193,12.356 47.193,11.836 47.498,11.532 R36.1@48.018,11.532
NetR36_2: R36.2 U16.1 | length 2.9
  Top Layer w0.254: R36.2 50.153,10.795 U16.1
NetR39_1: R39.1 U17.1 | length 5.7
  Top Layer w0.254: R39.1 43.549,46.99 44.59,45.949 46.584,45.949 46.863,46.228 U17.1
NetR41_1: R41.1 U18.1 | length 4.8
  Top Layer w0.254: U18.1 U18.1@67.945,36.195 ; U18.1@67.945,36.195 68.58,35.56 R41.1 68.973,36.195 U18.1@67.945,36.195
NetR45_1: R45.1 U19.1 | length 4.8
  Top Layer w0.254: U19.1 U19.1@67.945,41.275 ; U19.1@67.945,41.275 68.58,40.64 R45.1 68.973,41.275 U19.1@67.945,41.275
NetR46_1: R46.1 U3.16 | length 15.7
  Top Layer w0.254: U3.16 45.085,18.542 45.357,18.27 45.357,11.552 49.518,7.391 R46.1
NetR46_2: R46.2 U20.1 | length 10.3
  Top Layer w0.254: R46.2 48.018,5.512 49.898,3.632 53.086,3.632 53.619,4.166 53.619,5.436 53.34,5.715 U20.1
NetR47_1: R47.1 U21.1 | length 4.8
  Top Layer w0.254: U21.1 U21.1@67.945,46.355 ; U21.1@67.945,46.355 68.58,45.72 R47.1 68.973,46.355 U21.1@67.945,46.355
VCC: +5V.1 C10.2 C11.2 R1.1 R2.1 R5.1 R7.1 R9.1 R15.1 R21.1 R22.1 R23.1 R26.1 R31.1 R32.1 R37.1 R38.1 R42.1 R44.1 U3.20 | length 260.3
  Top Layer w0.762: R15.1 20.791,25.793 21.287,26.289 v1(23.495,26.289) ; R7.1 20.574,36.08 20.117,36.537 20.117,40.894 20.383,41.16 R5.1 R5.1@21.311,41.16 ; R1.1 R1.1@23.266,46.24 ; R23.1 35.699,9.564 36.322,8.941 37.846,8.941 ; R2.1 43.041,43.7 ; 43.84,37.948 43.815,37.922 ; R22.1 43.93,9.398 43.473,8.941 39.827,8.941 ; R37.1 44.831,36.83 ; +5V.1 U3.20 40.615,23.622 ; R31.1 50.558,31.166 51.498,30.226 52.393,30.226 ; v1(52.654,22.34) R21.1 ; R26.1 55.562,27.42 55.296,27.686 ; R32.1 55.804,32.5 ; R38.1 55.626,37.58 ; R42.1 55.562,42.66 ; R5.1@21.311,41.16 22.809,41.16 ; R5.1@21.311,41.16 21.311,40.056 22.809,38.557 ; v1@22.809,31 R9.1 v1@22.809,31.007 ; v1@22.809,31 v1(22.816,31) v1@22.809,31.007 ; v1@22.809,31 v1@22.809,31.007 ; v1@22.809,31.007 22.809,38.557 ; 22.809,38.557 22.809,41.16 ; 22.809,41.16 22.809,46.24 R1.1@23.266,46.24 ; 22.809,41.16 22.962,41.16 23.266,41.465 R1.1@23.266,46.24 ; 37.846,8.941 38.354,9.449 38.354,10.414 ; 37.846,8.941 39.827,8.941 ; 38.354,10.414 39.827,8.941 ; 38.354,10.414 38.354,22.39 ; 38.354,22.39 39.586,23.622 40.615,23.622 ; 38.354,22.39 38.354,32.461 39.599,33.706 ; 39.599,33.706 39.599,24.638 40.615,23.622 ; 39.599,33.706 43.777,37.884 ; 43.041,43.7 47.054,43.7 ; 43.041,43.7 43.815,42.926 ; 43.777,37.884 43.815,37.922 ; 43.777,37.884 43.815,37.846 ; 43.815,37.846 44.831,36.83 ; 43.815,37.846 43.815,36.83 44.831,36.83 ; 43.815,37.846 43.815,37.922 ; 43.815,37.922 43.815,42.926 ; 43.815,42.926 47.054,43.7 ; 47.054,43.7 50.876,39.878 ; 50.876,39.878 53.779,39.878 54.578,40.677 ; 50.876,39.878 53.601,37.153 ; 52.393,30.226 54.668,32.5 55.125,32.5 ; 52.393,30.226 54.795,30.226 ; 53.601,37.153 54.497,38.049 ; 53.601,37.153 55.296,35.458 ; 54.497,38.049 54.578,40.677 ; 54.497,38.049 54.795,38.347 ; 54.497,38.049 54.795,37.751 ; 54.578,40.677 54.795,40.894 ; 54.795,30.226 54.795,28.187 55.296,27.686 ; 54.795,30.226 54.795,32.17 55.125,32.5 ; 54.795,30.226 55.296,30.226 ; 54.795,37.751 54.795,37.25 54.985,37.25 ; 54.795,37.751 54.795,38.347 ; 54.795,37.751 54.92,37.626 ; 54.795,38.347 55.562,37.58 55.626,37.58 ; 54.795,38.347 54.92,37.626 ; 54.795,38.347 54.795,40.894 ; 54.795,40.894 54.795,42.653 ; 54.795,42.653 54.802,42.66 55.562,42.66 ; 54.795,42.653 54.795,43.427 ; 54.795,43.427 55.562,42.66 ; 54.795,43.427 54.795,47.733 ; 54.795,47.733 54.802,47.74 R44.1 54.795,47.733 ; 54.92,37.626 55.296,37.25 ; 54.92,37.626 54.985,37.25 ; 54.985,37.25 55.296,35.458 ; 54.985,37.25 55.296,37.25 ; 55.125,32.5 55.296,32.5 ; 55.296,27.686 55.296,30.226 ; 55.296,30.226 55.296,32.5 ; 55.296,32.5 55.296,35.458 ; 55.296,32.5 55.804,32.5 ; 55.296,35.458 55.804,32.5 ; 55.296,35.458 55.296,37.25 ; 55.296,37.25 55.626,37.58
  Bottom Layer w0.762: 22.733,26.289 v1(23.495,26.289) ; 22.816,26.289 v1(22.816,31) 22.816,17.018 38.386,17.018 38.386,23.084 C11.2 C10.2 ; 38.862,20.98 46.99,20.98 48.006,21.996 48.006,22.848 ; +5V.1 48.006,22.848 ; v1(52.654,22.34) 48.514,22.34 48.006,22.848

## Polygon pours and split planes (outlines as drawn)
GND on Top Layer "Bottom Overlay-No Net" (solid, remove dead copper, pour order 1): 24.511,30.099 32.004,30.099 32.004,18.034 31.877,17.907 31.623,18.161 24.511,18.161

## Other copper
Top Layer:
  pour cut-out: 27.813,29.337 27.813,18.796 31.496,18.796 31.496,29.337

## Silkscreen, mask and mechanical layers (free items; w line width, h text height)
Mechanical 1:
  the board outline again, w1.2